# EAGLE board prototype-circuit (EAGLE 9.7.0)

Size 138.46 x 148.16 mm. Coordinates in mm from the lower left corner, seen from the top.
Outline: 0,0 138.46,0 138.46,148.16 0,148.16 0,0
Copper layers (1*16): Top 0.035mm / dielectric 1.5mm / Bottom 0.035mm
Design rules "default": minimum track width 6mil, minimum drill 0.35mm, track to track 6mil, track to pad 6mil, pad to pad 6mil, via to via 6mil, smd to smd 6mil, copper to edge 40mil, drill to drill 6mil, minimum pad ring 10mil, minimum via ring 8mil, stop-mask expansion 4mil, vias tented up to drill 0mil, thermal gap 10mil

## Footprints (pad centres in the part's own frame; a part is rotated, then mirrored left to right if it is on the bottom)
BATTERY-GENERIC = drill 1.118 pad 3.15 octagon: + 2.54,0; - -2.54,0
MOTOR = drill 1.118 pad 3.15 octagon: + 2.54,0; - -2.54,0
1X06 = drill 1.016 long: 1 -6.35,0; 2 -3.81,0; 3 -1.27,0; 4 1.27,0; 5 3.81,0; 6 6.35,0
SENRD254W50D503H320B = drill 0.7 pad 1.3: 1 -1.27,0; 2 1.27,0
ARDUINO-UNO-R3-SHIELD = drill 1.016 pad 1.88: 3.3V 24.13,-2.54; 5V 24.13,0; A0 24.13,12.7; A1 24.13,15.24; A2 24.13,17.78; A3 24.13,20.32; A4 24.13,22.86; A5 24.13,25.4; AREF -24.13,-13.97; D2 -24.13,20.32; D3 -24.13,17.78; D4 -24.13,15.24; D5 -24.13,12.7; D6 -24.13,10.16; D7 -24.13,7.62; D8 -24.13,3.81; D9 -24.13,1.27; D10 -24.13,-1.27; D11 -24.13,-3.81; D12 -24.13,-6.35; D13 -24.13,-8.89; GND@0 24.13,2.54; GND@1 24.13,5.08; GND@2 -24.13,-11.43; IOREF 24.13,-7.62; NC 24.13,-10.16; RES 24.13,-5.08; RX -24.13,25.4; SCL -24.13,-19.05; SDA -24.13,-16.51; TX -24.13,22.86; VIN 24.13,7.62

## Placement (x,y rotation side)
BAT1  3V  [BATTERY-GENERIC]  8.26,139.91 0 top
M1  MOTOR_HDR  [MOTOR]  97.25,107.99 180 top
M2  MOTOR_HDR  [MOTOR]  130.21,108.25 180 top
POLOLU1  PINHD-1X06_1X06M  [1X06]  94.14,132.38 0 top
Q1  PHOTOTRANSISTOR  [SENRD254W50D503H320B]  89.99,34.56 90 top
Q2  PHOTOTRANSISTOR  [SENRD254W50D503H320B]  90.25,10.13 90 top
Q3  PHOTOTRANSISTOR  [SENRD254W50D503H320B]  90.21,17.58 90 top
Q4  PHOTOTRANSISTOR  [SENRD254W50D503H320B]  89.73,25.48 90 top
U1  ARDUINO-UNO-R3-SHIELD  [ARDUINO-UNO-R3-SHIELD]  40.38,34.52 180 top

## Library data of the parts
BAT1 M1 M2 POLOLU1 Q1-Q4 U1 = Tinkercad

## Nets
POLOLU1_3: M2.- POLOLU1.3
POLOLU1_4: M1.- POLOLU1.4
POLOLU1_5: M1.+ POLOLU1.5
POLOLU1_6: M2.+ POLOLU1.6
U1_D3: Q3.1 U1.D3
U1_D4: Q3.2 U1.D4
U1_D6: Q4.1 U1.D6
U1_D7: Q4.2 U1.D7
U1_D9: Q1.1 U1.D9
U1_D10: Q1.2 U1.D10
U1_RX: Q2.1 U1.RX
U1_TX: Q2.2 U1.TX

## Tracks (layer width: path | path; a pad name or v marks a point on that pad's centre or on a via)
POLOLU1_3  (1 unrouted)
POLOLU1_4  (1 unrouted)
POLOLU1_5  (1 unrouted)
POLOLU1_6  (1 unrouted)
U1_D3  (1 unrouted)
U1_D4  (1 unrouted)
U1_D6  (1 unrouted)
U1_D7  (1 unrouted)
U1_D9  (1 unrouted)
U1_D10  (1 unrouted)
U1_RX  (1 unrouted)
U1_TX  (1 unrouted)